# Altium PCB CAR2.PcbDoc
Units mil, origin at the board's own origin, x right, y up, seen from the top; angles counter-clockwise.
Board outline 6000 x 4000 mil, 2 copper layers (Top Layer, Bottom Layer); 43 components, 37 nets, 97 pads, 0 vias.
Unrouted connection lines stored in the file: 63.
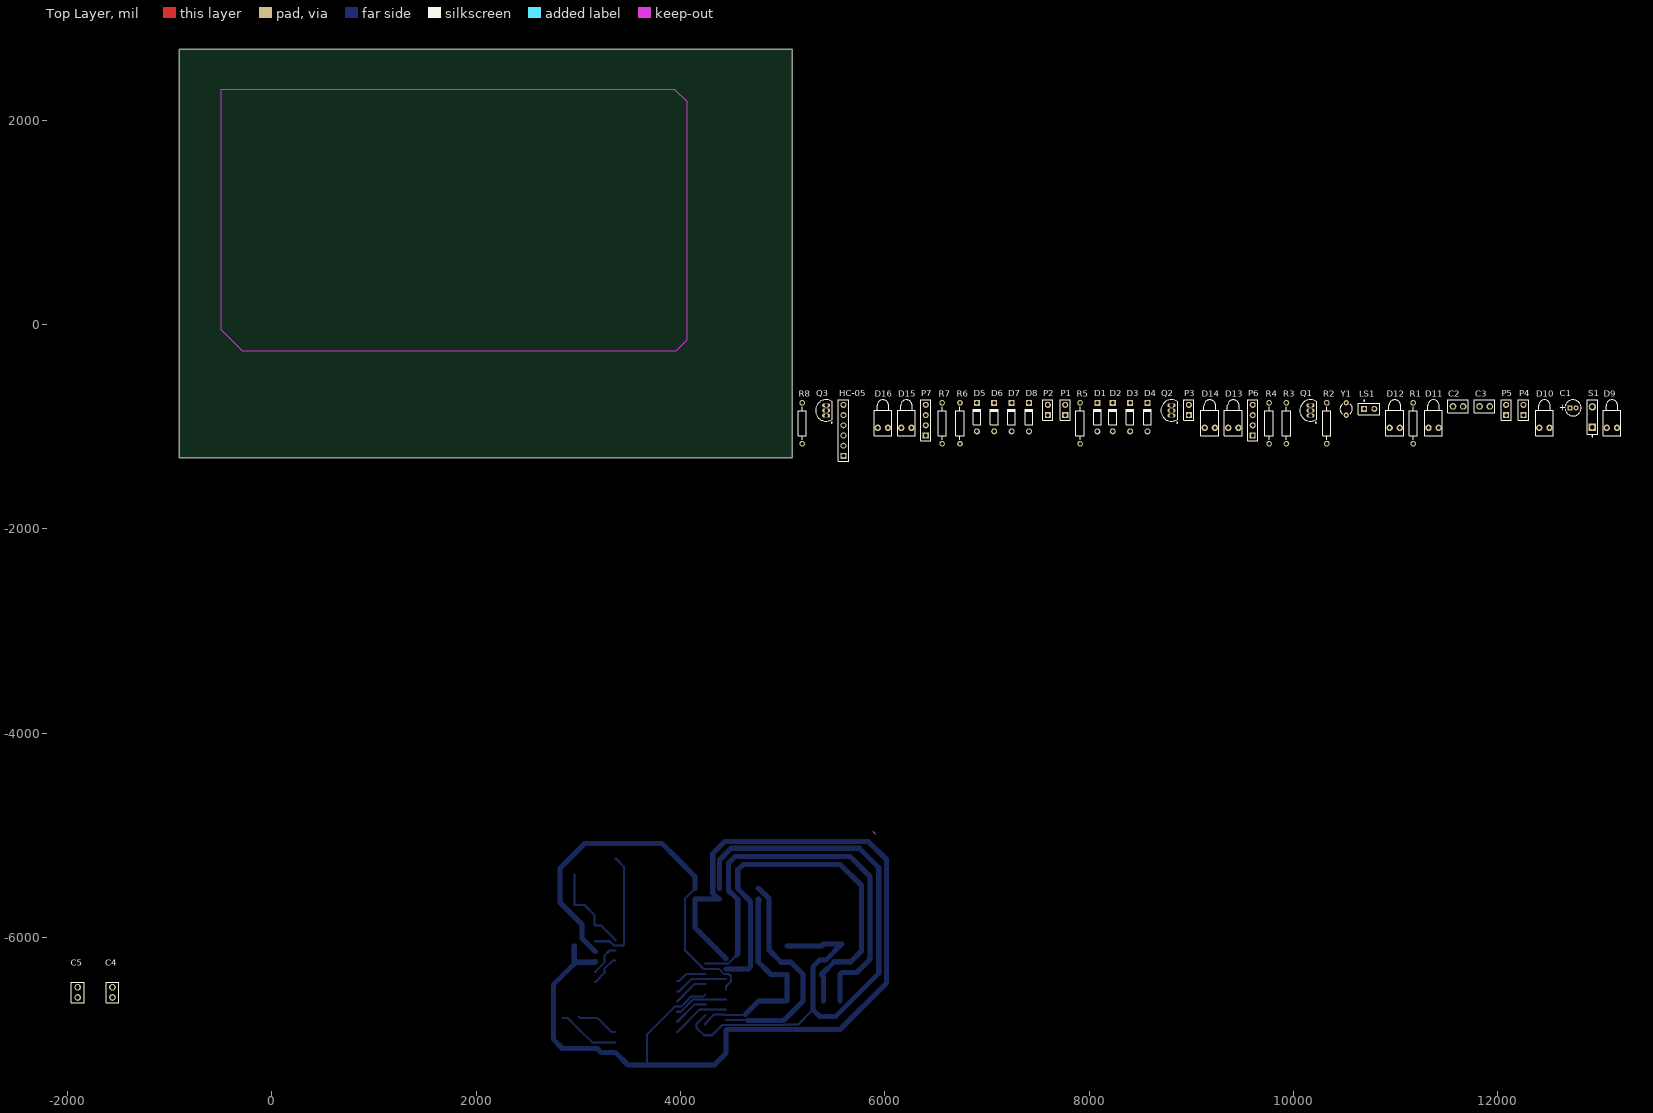
[diagram p0: Top Layer view]
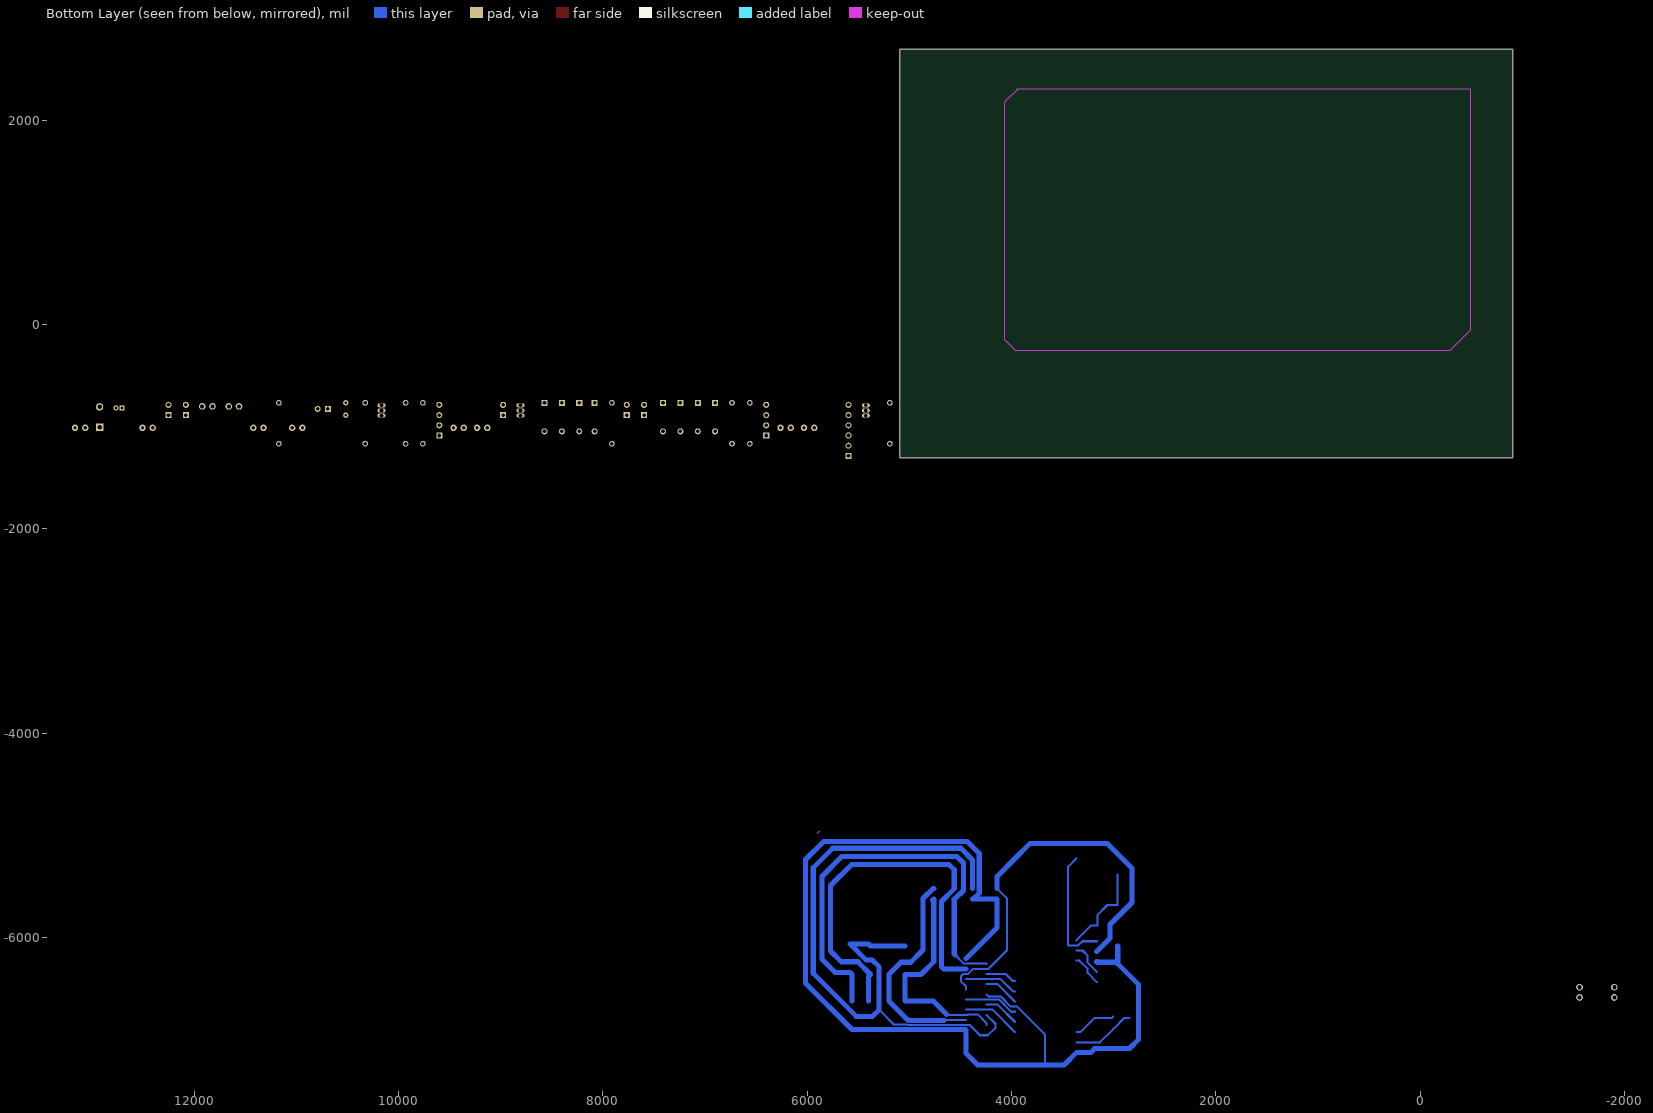
[diagram p1: Bottom Layer view, seen from below]

## Layer stack, top to bottom
Top Layer: signal copper 1.4
Dielectric: dielectric 12.6, FR-4, Dk 4.8
Bottom Layer: signal copper 1.4

## Board outline
-905,-1305 5095,-1305 5095,2695 -905,2695

## Design rules (kind name [scope] priority, off if disabled: settings)
Clearance [All] p1: gap=10
PolygonConnect [All] p1: connectstyle=Relief reliefconductorwidth=10 reliefentries=4 polygonreliefangle="90 Angle"
RoomDefinition CAR [InComponentClass('CAR')] p1: confinementstyle=ConfineIn formatcopy=TRUE lockcomponents=FALSE outline 5140,-1345 13210,-1345 13210,-625 5140,-625
RoutingVias [All] p1: holewidth=28 width=50 viastyle="Through Hole" minholewidth=28 minwidth=50 maxholewidth=28 maxwidth=50
SilkscreenOverComponentPads [All] p1: minsilkscreentomaskgap=10
SolderMaskExpansion [All] p1: expansion=4
Width [All] p1: maxlimit=100 minlimit=20 preferedwidth=20
27 further rules are at their usual default settings.

## Components (designator, comment, footprint, x,y, rotation, side; value= is the part's Value field where it differs from the comment)
C1 "Cap Pol1" CAPPR1.5-4x5 12735,-815 r0 top
C2 "Cap" CAPR2.54-5.1x3.2 11610,-800 r0 top
C3 "Cap" CAPR2.54-5.1x3.2 11870,-800 r0 top
C4 "Cap" CAPR2.54-5.1x3.2 -1560,-6535 r90 top
C5 "Cap" CAPR2.54-5.1x3.2 -1900,-6535 r90 top
D1 "Diode 1N914" DIO7.1-3.9x1.9 8080,-905 r90 top
D2 "Diode 1N914" DIO7.1-3.9x1.9 8230,-905 r90 top
D3 "Diode 1N914" DIO7.1-3.9x1.9 8400,-905 r90 top
D4 "Diode 1N914" DIO7.1-3.9x1.9 8570,-905 r90 top
D5 "Diode 1N914" DIO7.1-3.9x1.9 6900,-905 r90 top
D6 "Diode 1N914" DIO7.1-3.9x1.9 7070,-905 r90 top
D7 "Diode 1N914" DIO7.1-3.9x1.9 7240,-905 r90 top
D8 "Diode 1N914" DIO7.1-3.9x1.9 7410,-905 r90 top
D9 "" LED-1 13115,-1010 r90 top
D10 "" LED-1 12455,-1010 r90 top
D11 "" LED-1 11370,-1010 r90 top
D12 "" LED-1 10990,-1010 r90 top
D13 "RED" LED-1 9410,-1010 r90 top
D14 "" LED-1 9180,-1010 r90 top
D15 "RED" LED-1 6210,-1010 r90 top
D16 "" LED-1 5980,-1010 r90 top
HC-05 "Header 6" HDR1X6 5595,-1285 r90 top
LS1 "Bell" PIN2 10690,-825 r0 top
P1 "电机1" HDR1X2 7765,-885 r90 top
P2 "电机2" HDR1X2 7595,-885 r90 top
P3 "VS12v" HDR1X2 8975,-885 r90 top
P4 "VCC 5V" HDR1X2 12250,-885 r90 top
P5 "7-12V" HDR1X2 12080,-885 r90 top
P6 "Header 4" HDR1X4 9600,-1085 r90 top
P7 "Header 4" HDR1X4 6400,-1085 r90 top
Q1 "NPN" BCY-W3 10165,-840 r0 top
Q2 "NPN" BCY-W3 8805,-840 r0 top
Q3 "NPN" BCY-W3 5425,-840 r0 top
R1 "Res2" AXIAL-0.4 11170,-965 r90 top
R2 "10K" AXIAL-0.4 10325,-965 r90 top
R3 "4.7K" AXIAL-0.4 9930,-965 r90 top
R4 "4.7K" AXIAL-0.4 9760,-965 r90 top
R5 "47K" AXIAL-0.4 7910,-965 r90 top
R6 "4.7K" AXIAL-0.4 6735,-965 r90 top
R7 "4.7K" AXIAL-0.4 6560,-965 r90 top
R8 "47K" AXIAL-0.4 5190,-965 r90 top
S1 "SW-PB" SPST-2 12925,-905 r90 top
Y1 "XTAL" BCY-W2/D3.1 10515,-825 r0 top

## Footprints (in the part's own frame and the unit in brackets; to place one, negate y for a bottom-side part, rotate by r counter-clockwise, add the part's x,y. Pads: shape width x height; smd on the part's side, far side on the other; paste and mask are expansions set on the pad)
AXIAL-0.4 [mm] "Axial Device, Thru-Hole; 2 Leads; 0.4 in Pin Spacing"
  round 1.4 hole 0.85: 1(-5.08,0) 2(5.08,0)
  silkscreen extent -4.06,-1.02 4.06,1.02
BCY-W2/D3.1 [mm] "Crystal, Thru-Hole; 2 Leads; Body 3.1 x 8.2 mm (Dia.xH)"
  round 1.3 hole 0.7: 1(0,1.55) 2(0,-1.55)
  silkscreen extent -1.55,-1.19 1.55,1.17
BCY-W3 [mm] "TO, Flat Index; 3 In-Line, Axial Leads; Body Dia. 4.8mm; Leads 0.55 x 0.51 mm (max)"
  oval 2x1 hole 0.9: 1(0,-1.27) 2(0,0) 3(0,1.27)
  silkscreen extent -2.65,-3.13 1.52,2.65, body extent -2.66,-2.66 1.52,2.66, height 5.33
CAPPR1.5-4x5 [mm] "Capacitor, Electrolytic, Radial; Body 4 x 5 mm (Dia.xH typ); Pin Spacing 1.5 mm (typ)"
  rect 1.25x1.25 hole 0.75: 1(-0.75,0)
  round 1.25 hole 0.75: 2(0.75,0)
  silkscreen extent -2,-2 2,2
CAPR2.54-5.1x3.2 [mm] "Capacitor, Ceramic, Thru-Hole, Dipped Radial; Body 5.1 x 3.2 mm (WxT) Pin Spacing 2.54 mm (typ)"
  round 1.65 hole 1: 1(-1.27,0) 2(1.27,0)
  silkscreen extent -2.55,-1.6 2.55,1.6
DIO7.1-3.9x1.9 [mm] "Diode, Axial; Body 3.8 x 1.9 mm (LxDia. max), Lead Dia. 0.53 mm (max)"
  round 1.5 hole 0.9: 1(-3.55,0)
  rect 1.5x1.5 hole 0.9: 2(3.55,0)
  silkscreen extent -1.95,-0.95 2.05,0.95
HDR1X2 [mm] "Connector; Header; 2 Position"
  rect 1.5x1.5 hole 0.9: 1(0,0)
  round 1.5 hole 0.9: 2(2.54,0)
  silkscreen extent -1.27,-1.27 3.81,1.27
HDR1X4 [mm] "Connector; Header; 4 Position"
  rect 1.5x1.5 hole 0.9: 1(0,0)
  round 1.5 hole 0.9: 2(2.54,0) 3(5.08,0) 4(7.62,0)
  silkscreen extent -1.27,-1.27 8.89,1.27
HDR1X6 [mm] "Connector; Header; 6 Position"
  rect 1.5x1.5 hole 0.9: 1(0,0)
  round 1.5 hole 0.9: 2(2.54,0) 3(5.08,0) 4(7.62,0) 5(10.16,0) 6(12.7,0)
  silkscreen extent -1.27,-1.27 13.97,1.27
LED-1 [mm] "Typical RED GaAs LED; 2 Leads"
  round 1.6 hole 0.8: 1(0,1.27) 2(0,-1.27)
  silkscreen extent -2,-2.2 6.95,2.2
PIN2 [mm] "Photosensitive Diode; 2 Leads"
  rect 1.5x1.5 hole 0.9: 1(0,0)
  round 1.5 hole 0.9: 2(2.54,0)
  silkscreen extent -1.4,-1.4 3.94,2.17
SPST-2 [mm] "Circuit Breaker; 2 Leads"
  rect 1.85x1.85 hole 1.1: 1(-2.54,0)
  round 1.85 hole 1.1: 2(2.54,0)
  silkscreen extent -4.89,-1.27 4.28,1.27

## Part data
C1: "Polarized Capacitor (Radial)"
C2 C3 C4 C5: "Capacitor"
D1 D2 D3 D4 D5 D6 D7 D8: "High Conductance Fast Diode"
D9 D10 D11 D12 D14 D16: library part LED0, "Typical INFRARED GaAs LED"
D13 D15: library part LED_RCV
HC-05: "Header, 6-Pin"
LS1: "Electrical Bell"
P1 P2 P3 P4 P5: library part "Header 2", "Header, 2-Pin"
P6 P7: "Header, 4-Pin"
Q1 Q2 Q3: "NPN Bipolar Transistor"
R1: "Resistor"
R2 R3 R4 R5 R6 R7 R8: library part Res2, "Resistor"
S1: "Switch"
Y1: "Crystal Oscillator"

## Nets (pads, with @x,y where several pads share a name; then routed paths per layer and width w, separated by ;. In a path a pad name is that pad's centre, name@x,y a point inside that pad or via, vN(x,y) a via of type N, cw(c..) or ccw(c..) an arc to the next point about the centre after c; other vN are vias at no path point)
5: 
6: 
7: 
10: 
11: 
12: 
BELL: R2.2
GND: C2.1 C3.1 C4.1 C5.1 D5.1 D6.1 D7.1 D8.1 HC-05.4 P3.1 P4.2 P5.1 Q1.3 Q2.3 Q3.3 R1.1 R5.1 R8.1 | length 619.4
  Bottom Layer w20: 2845,-6785 2893.98,-6785 3005,-6896.02 3133.98,-7025 3365,-7025
K1: HC-05.3
LED0: D14.2 D16.2 P6.3 P7.3
LED0+: P6.4 P7.4
LED3: D9.2
LED4: D10.2
LED5: D11.2
LED6: D12.2
NetC1_2: C1.2 R1.2 S1.1
NetC3_2: C3.2 P4.1
NetC4_2: C4.2 Y1.1
NetC5_2: C5.2 Y1.2
NetD1_1: D1.1 D5.2 P1.1
NetD2_1: D2.1 D6.2 P1.2
NetD3_1: D3.1 D7.2 P2.1
NetD4_1: D4.1 D8.2 P2.2
NetD14_1: D14.1 R3.1
NetD16_1: D16.1 R6.1
NetLS1_1: LS1.1 Q1.1
NetQ1_2: Q1.2 R2.1
P31: HC-05.2
P32: HC-05.6
RED0: Q2.1 R4.1
RED0+: P6.2 P7.2
RED0-: P6.1 P7.1 Q2.2 R5.2
RED1: Q3.1 R7.1
RED1-: Q3.2 R8.2
VBAT: P5.2
VCC: C1.1 C2.2 D9.1 D10.1 D11.1 D12.1 HC-05.5 LS1.2 R3.2 R4.2 R6.2 R7.2 S1.2 | length 906.5
  Bottom Layer w20: 2960,-5380 2960,-5680 3060,-5680 3160,-5780 3160,-5880 3220,-5880 3365,-6025
VM: D1.2 D2.2 D3.2 D4.2 P3.2
pads on no net: D13.1 D13.2 D15.1 D15.2 HC-05.1
copper on no net: | length 38476.4
  Bottom Layer w20: 3005,-6773.98 3016.02,-6785 3185,-6785 3325,-6925 3365,-6925 ; 3165,-6435 3255,-6345 3255,-6305 3335,-6225 3365,-6225 ; 3165,-6335 3255,-6245 3255,-6175 3305,-6125 3365,-6125 ; 3165,-6035 3304.96,-6035 3344.48,-6074.53 3429.53,-6074.53 3435,-6080 3445,-6070 3445,-5305 3365,-5225 ; 3670,-7245 3670,-6949.96 3944.48,-6675.47 4007.1,-6675.47 4107.57,-6575 4225,-6575 4245,-6555 4245.47,-6554.53 ; 3965,-6925 4185,-6705 4445,-6705 ; 3965,-6825 4135,-6655 4245,-6655 ; 3965,-6725 4000,-6725 4120,-6605 4445,-6605 ; 3965,-6625 4135,-6455 4245,-6455 ; 3965,-6525 3985,-6525 4105,-6405 4445,-6405 ; 3965,-6425 3985,-6425 4055,-6355 4245,-6355 ; 4140,-5520 4045,-5615 4045,-6125.04 4224.48,-6304.53 4374.48,-6304.53 4424.48,-6354.53 4469.53,-6354.53 4494.53,-6379.53 4494.53,-6425.51 4445,-6475.04 4445,-6505 ; 4245,-6855 4245,-6835 4330,-6750 4419.96,-6750 4424.48,-6754.53 4630.47,-6754.53 4635,-6750 ; 4245,-6755 4155,-6845 4155,-6880 4230,-6955 4307.66,-6955 4407.9,-6854.76 5014.96,-6854.76 5019.48,-6850.24 5149.76,-6850.24 5295,-6705 ; 4245,-6255 4245.47,-6254.53 4465.52,-6254.53 4552.52,-6167.52 ; 4445,-6905 4450.24,-6905 ; 4445,-6805 4655.33,-6805 4660.09,-6809.76
  Bottom Layer w50: 2960,-6080 2960,-6240 ; 3165,-6235 3160,-6240 2960,-6240 ; 3165,-6135 3035,-6005 3035,-5870 2820,-5655 2820,-5320 2960,-5180 3060,-5080 3160,-5080 3820,-5080 3965,-5225 4140,-5400 4140,-5520 ; 4380,-5620 4371.45,-5620 ; 4380,-5520 4380,-5240 4495,-5125 5750,-5125 5940,-5315 5940,-6348.79 5518.79,-6770 5360,-6770 5295,-6705 5295,-6285 5360,-6220 5420.24,-6220 5580,-6060.24 5400,-6060.24 5380,-6080.24 5200,-6080.24 5040,-6080.24 ; 4445,-6905 4445,-7130 4330,-7245 3670,-7245 3485,-7245 3365,-7125 3225,-7125 3185,-7085 2845,-7085 2755,-6995 2755,-6460 2960,-6255 2960,-6240 ; 4445,-6305 4665,-6305 4685,-6285 4685,-5645 4560,-5520 4560,-5335 4610,-5285 5565,-5285 5770,-5490 5770,-6130 5665,-6235 5504.76,-6235 5380,-6359.76 5400,-6379.76 5400,-6620.24 ; 4445,-6205 4140,-5900 4140,-5620 4371.45,-5620 ; 4450.24,-6899.76 5040,-6899.76 5200,-6899.76 5400,-6899.76 5560,-6899.76 6015,-6444.76 6015,-5235 5840,-5060 4430.47,-5060 4315.47,-5175 4315.47,-5564.02 4371.45,-5620 ; 4552.52,-6167.52 4560,-6160.04 4560,-5620 4551.45,-5620 4470,-5538.55 4470,-5270 4535,-5205 5660,-5205 5855,-5400 5855,-6210 5725.24,-6339.76 5580,-6339.76 5560,-6359.76 5560,-6620.24 ; 4635,-6750 4764.76,-6620.24 5040,-6620.24 5040,-6359.76 4884.76,-6359.76 4760,-6235 4760,-5620 4770,-5630 ; 4660.09,-6809.76 4996.32,-6809.76 5000.85,-6805.24 5015,-6805.24 5200,-6620.24 5200,-6359.76 5080.12,-6239.88 4984.88,-6239.88 4865,-6120 4865,-5616.45 4768.55,-5520 4760,-5520

## Keep-outs
Keep-Out Layer:
  lines w10: 3940,2305 4065,2180 4065,-150 3960,-255 -290,-255 -495,-50 -495,2305 3950,2305 ; 5880,-4960 5905,-4985

## Text inside footprints (layer, text, board x,y; h text height)
C1: Top Overlay "+" at 12598.19,-844.53 h59.06